# Altium PCB PAY_IFB_VER1.PcbDoc (part 2 of 4)
Units mil, origin at the board's own origin, x right, y up, seen from the top; angles counter-clockwise.
Board outline 6000 x 4000 mil, 2 copper layers (Top Layer, Bottom Layer); 413 components, 311 nets, 2101 pads, 9 vias.
Unrouted connection lines stored in the file: 1231.
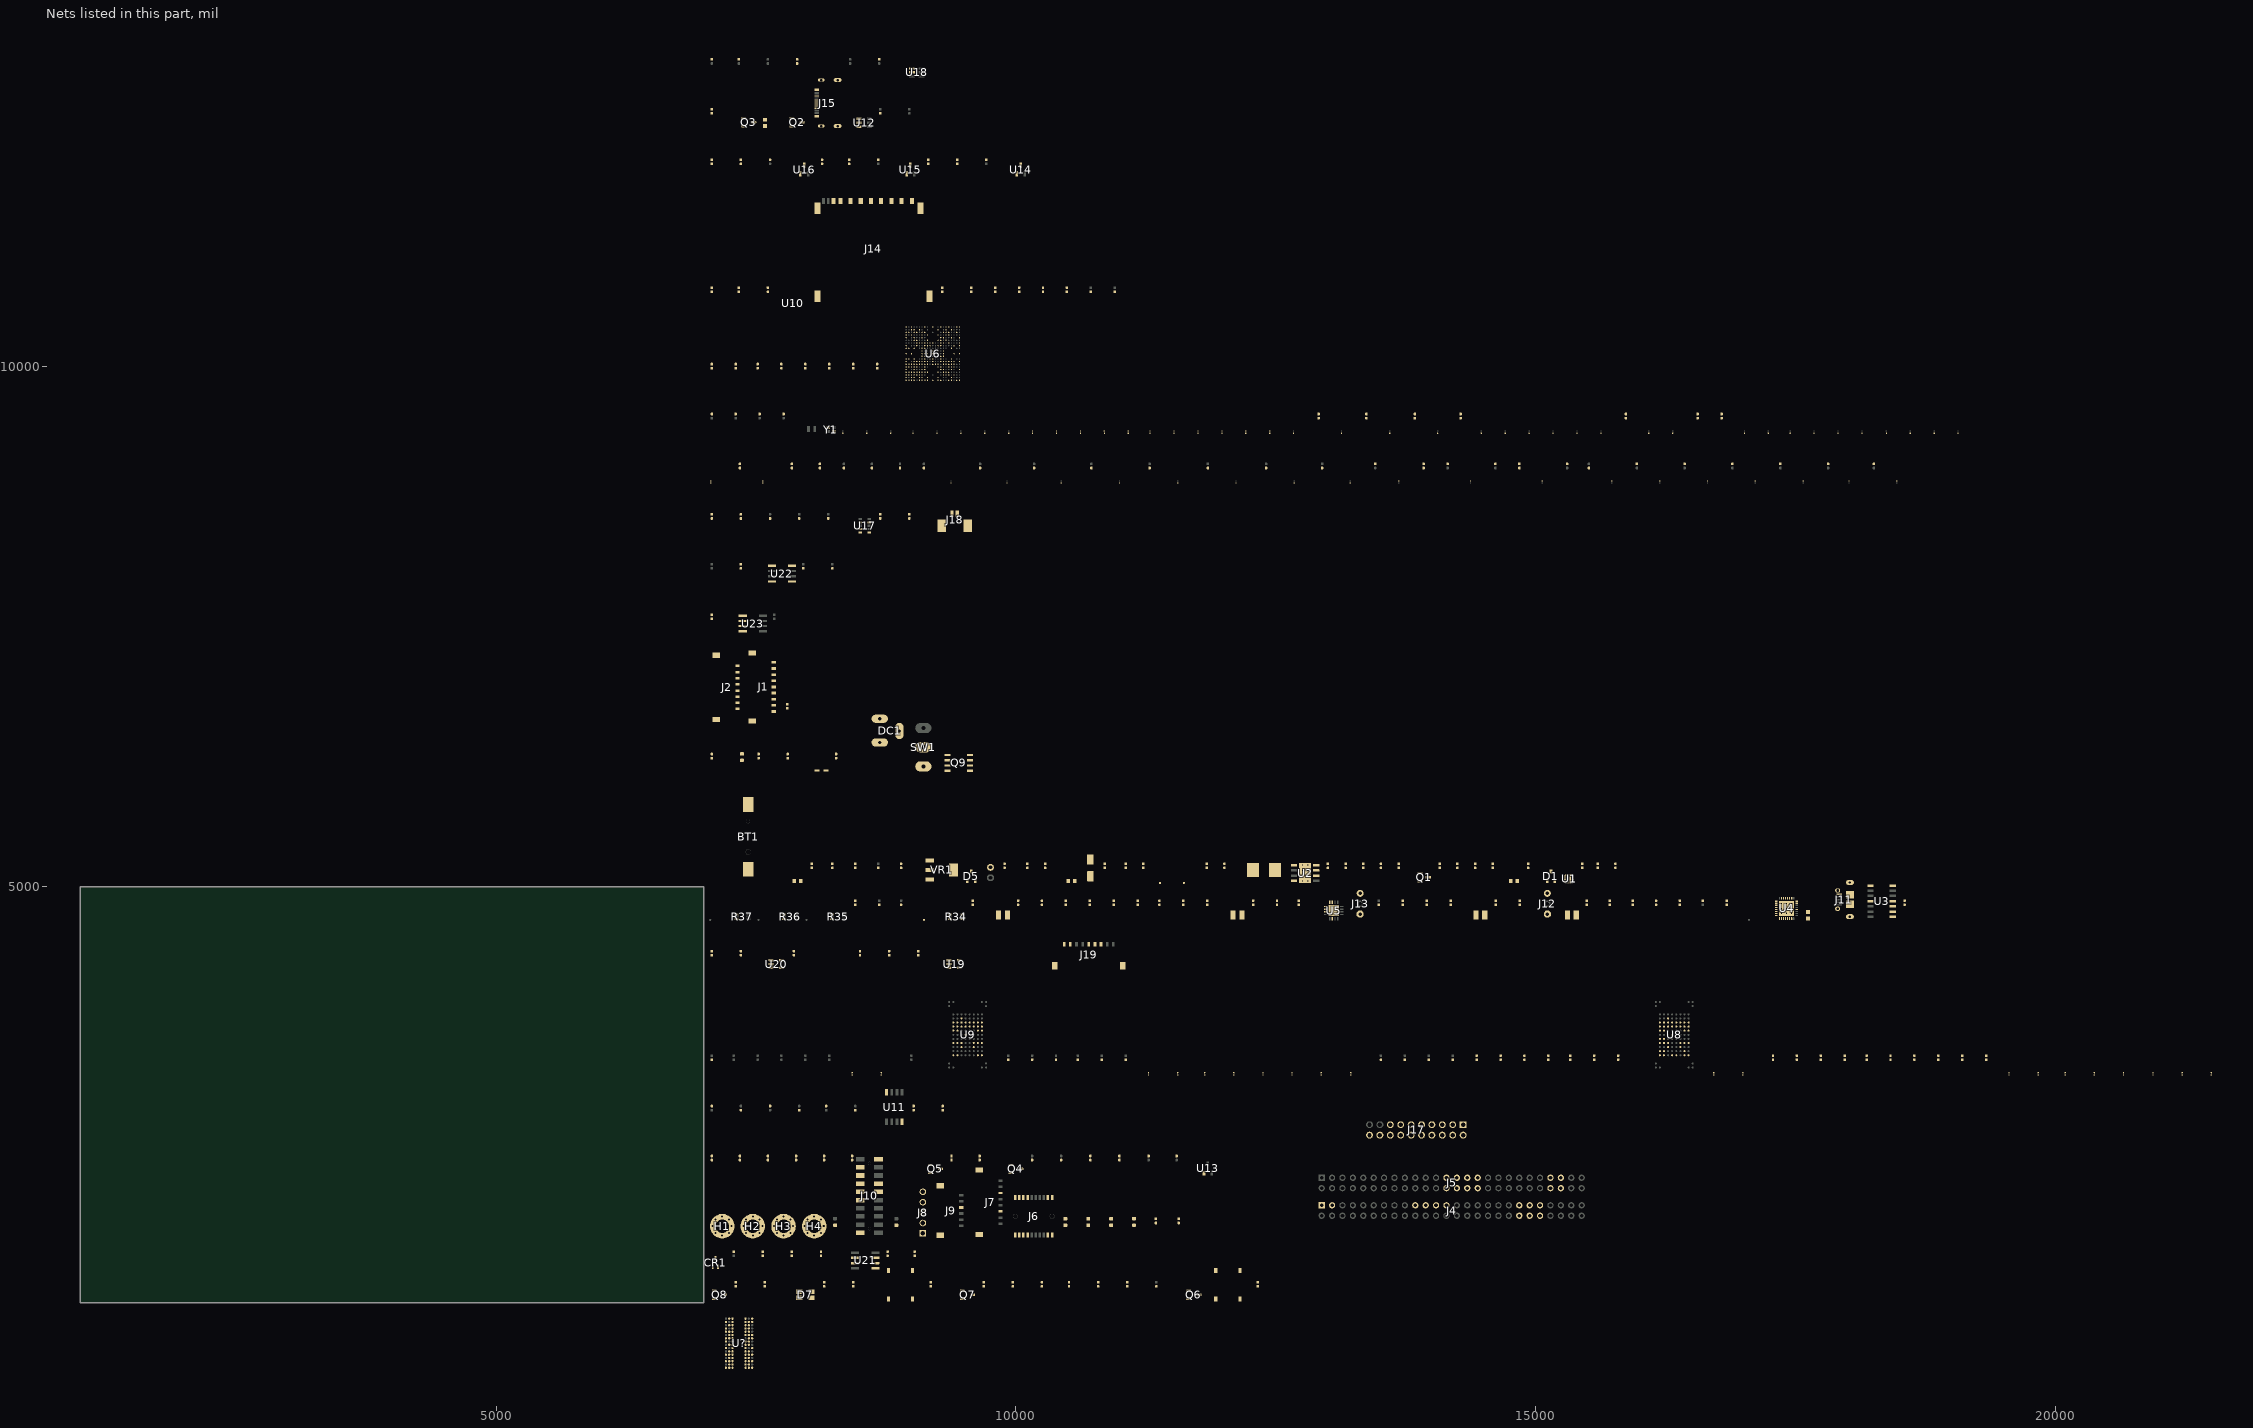
[diagram p2: the nets of this part, all layers, seen from the top]

## Footprints (in the part's own frame and the unit in brackets; to place one, negate y for a bottom-side part, rotate by r counter-clockwise, add the part's x,y. Pads: shape width x height; smd on the part's side, far side on the other; paste and mask are expansions set on the pad) (continued)
GCT_USB4520-03-0-A_REVA [mm]
  rect 0.6x1.1 smd: A1_B12(-3.2,5.15) A4_B9(-2.4,5.15) B1_A12(3.2,5.15) B4_A9(2.4,5.15)
  rect 0.3x1.1 smd: A5(-1.25,5.15) A6(-0.25,5.15) A7(0.25,5.15) A8(1.25,5.15) B5(1.75,5.15) B6(0.75,5.15) B7(-0.75,5.15) B8(-1.75,5.15)
  oval 0.95x1.9 hole 0.6 slot 1.8 at 90 deg mask+0: S1(-5.62,0) S4(5.62,0)
  oval 0.8x1.6 hole 0.6 slot 1.4 at 90 deg mask+0: S2(5.62,4) S3(-5.62,4)
  Top Layer region: 5.646,1.099 5.672,1.097 5.698,1.094 5.724,1.089 5.749,1.083 5.775,1.076 5.799,1.067 5.823,1.057 5.847,1.046 5.87,1.033 5.892,1.019 5.914,1.005 5.935,0.989 5.955,0.972 5.974,0.954 5.992,0.935 6.009,0.915 6.025,0.894 6.039,0.872 6.053,0.85 6.066,0.827 6.077,0.803 6.087,0.779 6.096,0.755 6.103,0.729 6.109,0.704 6.114,0.678 6.117,0.652 6.119,0.626 6.12,0.6 6.12,-0.6 6.119,-0.626 6.117,-0.652 6.114,-0.678 6.109,-0.704 6.103,-0.729 6.096,-0.755 6.087,-0.779 6.077,-0.803 6.066,-0.827 6.053,-0.85 6.039,-0.872 6.025,-0.894 6.009,-0.915 5.992,-0.935 5.974,-0.954 5.955,-0.972 5.935,-0.989 5.914,-1.005 5.892,-1.019 5.87,-1.033 5.847,-1.046 5.823,-1.057 5.799,-1.067 5.775,-1.076 5.749,-1.083 5.724,-1.089 5.698,-1.094 5.672,-1.097 5.646,-1.099 5.62,-1.1 5.594,-1.099 5.568,-1.097 5.542,-1.094 5.516,-1.089 5.491,-1.083 5.465,-1.076 5.441,-1.067 5.417,-1.057 5.393,-1.046 5.37,-1.033 5.348,-1.019 5.326,-1.005 5.305,-0.989 5.285,-0.972 5.266,-0.954 5.248,-0.935 5.231,-0.915 5.215,-0.894 5.201,-0.872 5.187,-0.85 5.174,-0.827 5.163,-0.803 5.153,-0.779 5.144,-0.755 5.137,-0.729 5.131,-0.704 5.126,-0.678 5.123,-0.652 5.121,-0.626 5.12,-0.6 5.12,0.6 5.121,0.626 5.123,0.652 5.126,0.678 5.131,0.704 5.137,0.729 5.144,0.755 5.153,0.779 5.163,0.803 5.174,0.827 5.187,0.85 5.201,0.872 5.215,0.894 5.231,0.915 5.248,0.935 5.266,0.954 5.285,0.972 5.305,0.989 5.326,1.005 5.348,1.019 5.37,1.033 5.393,1.046 5.417,1.057 5.441,1.067 5.465,1.076 5.491,1.083 5.516,1.089 5.542,1.094 5.568,1.097 5.594,1.099 5.62,1.1
  Top Layer region: -5.594,1.099 -5.568,1.097 -5.542,1.094 -5.516,1.089 -5.491,1.083 -5.465,1.076 -5.441,1.067 -5.417,1.057 -5.393,1.046 -5.37,1.033 -5.348,1.019 -5.326,1.005 -5.305,0.989 -5.285,0.972 -5.266,0.954 -5.248,0.935 -5.231,0.915 -5.215,0.894 -5.201,0.872 -5.187,0.85 -5.174,0.827 -5.163,0.803 -5.153,0.779 -5.144,0.755 -5.137,0.729 -5.131,0.704 -5.126,0.678 -5.123,0.652 -5.121,0.626 -5.12,0.6 -5.12,-0.6 -5.121,-0.626 -5.123,-0.652 -5.126,-0.678 -5.131,-0.704 -5.137,-0.729 -5.144,-0.755 -5.153,-0.779 -5.163,-0.803 -5.174,-0.827 -5.187,-0.85 -5.201,-0.872 -5.215,-0.894 -5.231,-0.915 -5.248,-0.935 -5.266,-0.954 -5.285,-0.972 -5.305,-0.989 -5.326,-1.005 -5.348,-1.019 -5.37,-1.033 -5.393,-1.046 -5.417,-1.057 -5.441,-1.067 -5.465,-1.076 -5.491,-1.083 -5.516,-1.089 -5.542,-1.094 -5.568,-1.097 -5.594,-1.099 -5.62,-1.1 -5.646,-1.099 -5.672,-1.097 -5.698,-1.094 -5.724,-1.089 -5.749,-1.083 -5.775,-1.076 -5.799,-1.067 -5.823,-1.057 -5.847,-1.046 -5.87,-1.033 -5.892,-1.019 -5.914,-1.005 -5.935,-0.989 -5.955,-0.972 -5.974,-0.954 -5.992,-0.935 -6.009,-0.915 -6.025,-0.894 -6.039,-0.872 -6.053,-0.85 -6.066,-0.827 -6.077,-0.803 -6.087,-0.779 -6.096,-0.755 -6.103,-0.729 -6.109,-0.704 -6.114,-0.678 -6.117,-0.652 -6.119,-0.626 -6.12,-0.6 -6.12,0.6 -6.119,0.626 -6.117,0.652 -6.114,0.678 -6.109,0.704 -6.103,0.729 -6.096,0.755 -6.087,0.779 -6.077,0.803 -6.066,0.827 -6.053,0.85 -6.039,0.872 -6.025,0.894 -6.009,0.915 -5.992,0.935 -5.974,0.954 -5.955,0.972 -5.935,0.989 -5.914,1.005 -5.892,1.019 -5.87,1.033 -5.847,1.046 -5.823,1.057 -5.799,1.067 -5.775,1.076 -5.749,1.083 -5.724,1.089 -5.698,1.094 -5.672,1.097 -5.646,1.099 -5.62,1.1
  Top Layer region: 5.646,4.899 5.672,4.897 5.698,4.894 5.724,4.889 5.749,4.883 5.775,4.876 5.799,4.867 5.823,4.857 5.847,4.846 5.87,4.833 5.892,4.819 5.914,4.805 5.935,4.789 5.955,4.772 5.974,4.754 5.992,4.735 6.009,4.715 6.025,4.694 6.039,4.672 6.053,4.65 6.066,4.627 6.077,4.603 6.087,4.579 6.096,4.555 6.103,4.529 6.109,4.504 6.114,4.478 6.117,4.452 6.119,4.426 6.12,4.4 6.12,3.6 6.119,3.574 6.117,3.548 6.114,3.522 6.109,3.496 6.103,3.471 6.096,3.445 6.087,3.421 6.077,3.397 6.066,3.373 6.053,3.35 6.039,3.328 6.025,3.306 6.009,3.285 5.992,3.265 5.974,3.246 5.955,3.228 5.935,3.211 5.914,3.195 5.892,3.181 5.87,3.167 5.847,3.154 5.823,3.143 5.799,3.133 5.775,3.124 5.749,3.117 5.724,3.111 5.698,3.106 5.672,3.103 5.646,3.101 5.62,3.1 5.594,3.101 5.568,3.103 5.542,3.106 5.516,3.111 5.491,3.117 5.465,3.124 5.441,3.133 5.417,3.143 5.393,3.154 5.37,3.167 5.348,3.181 5.326,3.195 5.305,3.211 5.285,3.228 5.266,3.246 5.248,3.265 5.231,3.285 5.215,3.306 5.201,3.328 5.187,3.35 5.174,3.373 5.163,3.397 5.153,3.421 5.144,3.445 5.137,3.471 5.131,3.496 5.126,3.522 5.123,3.548 5.121,3.574 5.12,3.6 5.12,4.4 5.121,4.426 5.123,4.452 5.126,4.478 5.131,4.504 5.137,4.529 5.144,4.555 5.153,4.579 5.163,4.603 5.174,4.627 5.187,4.65 5.201,4.672 5.215,4.694 5.231,4.715 5.248,4.735 5.266,4.754 5.285,4.772 5.305,4.789 5.326,4.805 5.348,4.819 5.37,4.833 5.393,4.846 5.417,4.857 5.441,4.867 5.465,4.876 5.491,4.883 5.516,4.889 5.542,4.894 5.568,4.897 5.594,4.899 5.62,4.9
  Top Layer region: -5.594,4.899 -5.568,4.897 -5.542,4.894 -5.516,4.889 -5.491,4.883 -5.465,4.876 -5.441,4.867 -5.417,4.857 -5.393,4.846 -5.37,4.833 -5.348,4.819 -5.326,4.805 -5.305,4.789 -5.285,4.772 -5.266,4.754 -5.248,4.735 -5.231,4.715 -5.215,4.694 -5.201,4.672 -5.187,4.65 -5.174,4.627 -5.163,4.603 -5.153,4.579 -5.144,4.555 -5.137,4.529 -5.131,4.504 -5.126,4.478 -5.123,4.452 -5.121,4.426 -5.12,4.4 -5.12,3.6 -5.121,3.574 -5.123,3.548 -5.126,3.522 -5.131,3.496 -5.137,3.471 -5.144,3.445 -5.153,3.421 -5.163,3.397 -5.174,3.373 -5.187,3.35 -5.201,3.328 -5.215,3.306 -5.231,3.285 -5.248,3.265 -5.266,3.246 -5.285,3.228 -5.305,3.211 -5.326,3.195 -5.348,3.181 -5.37,3.167 -5.393,3.154 -5.417,3.143 -5.441,3.133 -5.465,3.124 -5.491,3.117 -5.516,3.111 -5.542,3.106 -5.568,3.103 -5.594,3.101 -5.62,3.1 -5.646,3.101 -5.672,3.103 -5.698,3.106 -5.724,3.111 -5.749,3.117 -5.775,3.124 -5.799,3.133 -5.823,3.143 -5.847,3.154 -5.87,3.167 -5.892,3.181 -5.914,3.195 -5.935,3.211 -5.955,3.228 -5.974,3.246 -5.992,3.265 -6.009,3.285 -6.025,3.306 -6.039,3.328 -6.053,3.35 -6.066,3.373 -6.077,3.397 -6.087,3.421 -6.096,3.445 -6.103,3.471 -6.109,3.496 -6.114,3.522 -6.117,3.548 -6.119,3.574 -6.12,3.6 -6.12,4.4 -6.119,4.426 -6.117,4.452 -6.114,4.478 -6.109,4.504 -6.103,4.529 -6.096,4.555 -6.087,4.579 -6.077,4.603 -6.066,4.627 -6.053,4.65 -6.039,4.672 -6.025,4.694 -6.009,4.715 -5.992,4.735 -5.974,4.754 -5.955,4.772 -5.935,4.789 -5.914,4.805 -5.892,4.819 -5.87,4.833 -5.847,4.846 -5.823,4.857 -5.799,4.867 -5.775,4.876 -5.749,4.883 -5.724,4.889 -5.698,4.894 -5.672,4.897 -5.646,4.899 -5.62,4.9
  Bottom Layer region: -5.594,1.099 -5.568,1.097 -5.542,1.094 -5.516,1.089 -5.491,1.083 -5.465,1.076 -5.441,1.067 -5.417,1.057 -5.393,1.046 -5.37,1.033 -5.348,1.019 -5.326,1.005 -5.305,0.989 -5.285,0.972 -5.266,0.954 -5.248,0.935 -5.231,0.915 -5.215,0.894 -5.201,0.872 -5.187,0.85 -5.174,0.827 -5.163,0.803 -5.153,0.779 -5.144,0.755 -5.137,0.729 -5.131,0.704 -5.126,0.678 -5.123,0.652 -5.121,0.626 -5.12,0.6 -5.12,-0.6 -5.121,-0.626 -5.123,-0.652 -5.126,-0.678 -5.131,-0.704 -5.137,-0.729 -5.144,-0.755 -5.153,-0.779 -5.163,-0.803 -5.174,-0.827 -5.187,-0.85 -5.201,-0.872 -5.215,-0.894 -5.231,-0.915 -5.248,-0.935 -5.266,-0.954 -5.285,-0.972 -5.305,-0.989 -5.326,-1.005 -5.348,-1.019 -5.37,-1.033 -5.393,-1.046 -5.417,-1.057 -5.441,-1.067 -5.465,-1.076 -5.491,-1.083 -5.516,-1.089 -5.542,-1.094 -5.568,-1.097 -5.594,-1.099 -5.62,-1.1 -5.646,-1.099 -5.672,-1.097 -5.698,-1.094 -5.724,-1.089 -5.749,-1.083 -5.775,-1.076 -5.799,-1.067 -5.823,-1.057 -5.847,-1.046 -5.87,-1.033 -5.892,-1.019 -5.914,-1.005 -5.935,-0.989 -5.955,-0.972 -5.974,-0.954 -5.992,-0.935 -6.009,-0.915 -6.025,-0.894 -6.039,-0.872 -6.053,-0.85 -6.066,-0.827 -6.077,-0.803 -6.087,-0.779 -6.096,-0.755 -6.103,-0.729 -6.109,-0.704 -6.114,-0.678 -6.117,-0.652 -6.119,-0.626 -6.12,-0.6 -6.12,0.6 -6.119,0.626 -6.117,0.652 -6.114,0.678 -6.109,0.704 -6.103,0.729 -6.096,0.755 -6.087,0.779 -6.077,0.803 -6.066,0.827 -6.053,0.85 -6.039,0.872 -6.025,0.894 -6.009,0.915 -5.992,0.935 -5.974,0.954 -5.955,0.972 -5.935,0.989 -5.914,1.005 -5.892,1.019 -5.87,1.033 -5.847,1.046 -5.823,1.057 -5.799,1.067 -5.775,1.076 -5.749,1.083 -5.724,1.089 -5.698,1.094 -5.672,1.097 -5.646,1.099 -5.62,1.1
  Bottom Layer region: 5.646,1.099 5.672,1.097 5.698,1.094 5.724,1.089 5.749,1.083 5.775,1.076 5.799,1.067 5.823,1.057 5.847,1.046 5.87,1.033 5.892,1.019 5.914,1.005 5.935,0.989 5.955,0.972 5.974,0.954 5.992,0.935 6.009,0.915 6.025,0.894 6.039,0.872 6.053,0.85 6.066,0.827 6.077,0.803 6.087,0.779 6.096,0.755 6.103,0.729 6.109,0.704 6.114,0.678 6.117,0.652 6.119,0.626 6.12,0.6 6.12,-0.6 6.119,-0.626 6.117,-0.652 6.114,-0.678 6.109,-0.704 6.103,-0.729 6.096,-0.755 6.087,-0.779 6.077,-0.803 6.066,-0.827 6.053,-0.85 6.039,-0.872 6.025,-0.894 6.009,-0.915 5.992,-0.935 5.974,-0.954 5.955,-0.972 5.935,-0.989 5.914,-1.005 5.892,-1.019 5.87,-1.033 5.847,-1.046 5.823,-1.057 5.799,-1.067 5.775,-1.076 5.749,-1.083 5.724,-1.089 5.698,-1.094 5.672,-1.097 5.646,-1.099 5.62,-1.1 5.594,-1.099 5.568,-1.097 5.542,-1.094 5.516,-1.089 5.491,-1.083 5.465,-1.076 5.441,-1.067 5.417,-1.057 5.393,-1.046 5.37,-1.033 5.348,-1.019 5.326,-1.005 5.305,-0.989 5.285,-0.972 5.266,-0.954 5.248,-0.935 5.231,-0.915 5.215,-0.894 5.201,-0.872 5.187,-0.85 5.174,-0.827 5.163,-0.803 5.153,-0.779 5.144,-0.755 5.137,-0.729 5.131,-0.704 5.126,-0.678 5.123,-0.652 5.121,-0.626 5.12,-0.6 5.12,0.6 5.121,0.626 5.123,0.652 5.126,0.678 5.131,0.704 5.137,0.729 5.144,0.755 5.153,0.779 5.163,0.803 5.174,0.827 5.187,0.85 5.201,0.872 5.215,0.894 5.231,0.915 5.248,0.935 5.266,0.954 5.285,0.972 5.305,0.989 5.326,1.005 5.348,1.019 5.37,1.033 5.393,1.046 5.417,1.057 5.441,1.067 5.465,1.076 5.491,1.083 5.516,1.089 5.542,1.094 5.568,1.097 5.594,1.099 5.62,1.1
  Bottom Layer region: 5.646,4.899 5.672,4.897 5.698,4.894 5.724,4.889 5.749,4.883 5.775,4.876 5.799,4.867 5.823,4.857 5.847,4.846 5.87,4.833 5.892,4.819 5.914,4.805 5.935,4.789 5.955,4.772 5.974,4.754 5.992,4.735 6.009,4.715 6.025,4.694 6.039,4.672 6.053,4.65 6.066,4.627 6.077,4.603 6.087,4.579 6.096,4.555 6.103,4.529 6.109,4.504 6.114,4.478 6.117,4.452 6.119,4.426 6.12,4.4 6.12,3.6 6.119,3.574 6.117,3.548 6.114,3.522 6.109,3.496 6.103,3.471 6.096,3.445 6.087,3.421 6.077,3.397 6.066,3.373 6.053,3.35 6.039,3.328 6.025,3.306 6.009,3.285 5.992,3.265 5.974,3.246 5.955,3.228 5.935,3.211 5.914,3.195 5.892,3.181 5.87,3.167 5.847,3.154 5.823,3.143 5.799,3.133 5.775,3.124 5.749,3.117 5.724,3.111 5.698,3.106 5.672,3.103 5.646,3.101 5.62,3.1 5.594,3.101 5.568,3.103 5.542,3.106 5.516,3.111 5.491,3.117 5.465,3.124 5.441,3.133 5.417,3.143 5.393,3.154 5.37,3.167 5.348,3.181 5.326,3.195 5.305,3.211 5.285,3.228 5.266,3.246 5.248,3.265 5.231,3.285 5.215,3.306 5.201,3.328 5.187,3.35 5.174,3.373 5.163,3.397 5.153,3.421 5.144,3.445 5.137,3.471 5.131,3.496 5.126,3.522 5.123,3.548 5.121,3.574 5.12,3.6 5.12,4.4 5.121,4.426 5.123,4.452 5.126,4.478 5.131,4.504 5.137,4.529 5.144,4.555 5.153,4.579 5.163,4.603 5.174,4.627 5.187,4.65 5.201,4.672 5.215,4.694 5.231,4.715 5.248,4.735 5.266,4.754 5.285,4.772 5.305,4.789 5.326,4.805 5.348,4.819 5.37,4.833 5.393,4.846 5.417,4.857 5.441,4.867 5.465,4.876 5.491,4.883 5.516,4.889 5.542,4.894 5.568,4.897 5.594,4.899 5.62,4.9
  Bottom Layer region: -5.594,4.899 -5.568,4.897 -5.542,4.894 -5.516,4.889 -5.491,4.883 -5.465,4.876 -5.441,4.867 -5.417,4.857 -5.393,4.846 -5.37,4.833 -5.348,4.819 -5.326,4.805 -5.305,4.789 -5.285,4.772 -5.266,4.754 -5.248,4.735 -5.231,4.715 -5.215,4.694 -5.201,4.672 -5.187,4.65 -5.174,4.627 -5.163,4.603 -5.153,4.579 -5.144,4.555 -5.137,4.529 -5.131,4.504 -5.126,4.478 -5.123,4.452 -5.121,4.426 -5.12,4.4 -5.12,3.6 -5.121,3.574 -5.123,3.548 -5.126,3.522 -5.131,3.496 -5.137,3.471 -5.144,3.445 -5.153,3.421 -5.163,3.397 -5.174,3.373 -5.187,3.35 -5.201,3.328 -5.215,3.306 -5.231,3.285 -5.248,3.265 -5.266,3.246 -5.285,3.228 -5.305,3.211 -5.326,3.195 -5.348,3.181 -5.37,3.167 -5.393,3.154 -5.417,3.143 -5.441,3.133 -5.465,3.124 -5.491,3.117 -5.516,3.111 -5.542,3.106 -5.568,3.103 -5.594,3.101 -5.62,3.1 -5.646,3.101 -5.672,3.103 -5.698,3.106 -5.724,3.111 -5.749,3.117 -5.775,3.124 -5.799,3.133 -5.823,3.143 -5.847,3.154 -5.87,3.167 -5.892,3.181 -5.914,3.195 -5.935,3.211 -5.955,3.228 -5.974,3.246 -5.992,3.265 -6.009,3.285 -6.025,3.306 -6.039,3.328 -6.053,3.35 -6.066,3.373 -6.077,3.397 -6.087,3.421 -6.096,3.445 -6.103,3.471 -6.109,3.496 -6.114,3.522 -6.117,3.548 -6.119,3.574 -6.12,3.6 -6.12,4.4 -6.119,4.426 -6.117,4.452 -6.114,4.478 -6.109,4.504 -6.103,4.529 -6.096,4.555 -6.087,4.579 -6.077,4.603 -6.066,4.627 -6.053,4.65 -6.039,4.672 -6.025,4.694 -6.009,4.715 -5.992,4.735 -5.974,4.754 -5.955,4.772 -5.935,4.789 -5.914,4.805 -5.892,4.819 -5.87,4.833 -5.847,4.846 -5.823,4.857 -5.799,4.867 -5.775,4.876 -5.749,4.883 -5.724,4.889 -5.698,4.894 -5.672,4.897 -5.646,4.899 -5.62,4.9
  silkscreen extent -4.47,-1.6 4.47,6.45, body extent -5.77,-2.1 5.77,5.1, height 1.06
HDR_M_2.54_1x2 [mm] "Header Male Vertical 2 Way 2.54mm Pitch"
  oct 1.7x1.7 hole 0.9: 1(-1.27,0)
  round 1.7 hole 0.9: 2(1.27,0)
  silkscreen extent -2.52,-1.27 2.54,1.28, body extent -2.54,-1.27 2.54,1.27, height 5.94
HDR_M_2.54_1x3 [mm] "Header Male Vertical 4 Way P=2.54mm"
  oct 1.7x1.7 hole 0.9: 1(-2.54,0)
  round 1.7 hole 0.9: 2(0,0) 3(2.54,0)
  silkscreen extent -3.94,-1.4 3.96,1.4, body extent -3.8,-1.26 3.82,1.28, height 5.94
HDR_M_2.54_2X10_SBH11-PBPC-D10-ST-BK [mil] "20 Positions Header Connector 0.100\" (2.54mm) Through Hole Gold"
  rect 66x66 hole 42: 1(-450,-50)
  round 66 hole 42: 2(-450,50) 3(-350,-50) 4(-350,50) 5(-250,-50) 6(-250,50) 7(-150,-50) 8(-150,50) 9(-50,-50) 10(-50,50) 11(50,-50) 12(50,50) 13(150,-50) 14(150,50) 15(250,-50) 16(250,50) 17(350,-50) 18(350,50) 19(450,-50) 20(450,50)
  silkscreen extent -659,-185 659,197, body extent -648,-173 648,185, height 359
Header_254P_5x1 [mm]
  rect 1.6x1.6 hole 1.1: 1(-5.08,0)
  round 1.6 hole 1.1: 2(-2.54,0) 3(0,0) 4(2.54,0) 5(5.08,0)
  silkscreen extent -6.35,-1.27 6.35,1.27, body extent -6.38,-1.22 6.32,1.18, height 8.48
HOLE_SPACE [mm]
  round 1 hole 0.5: 1(-2.325,0) 1(-1.644,-1.644) 1(-1.644,1.644) 1(0,-2.286) 1(0,2.325) 1(1.644,-1.644) 1(1.644,1.644) 1(2.325,0)
  round 6 hole 3.3: 1(0,0)
IC_MIC94085YFT-TR [mm]
  rect 0.2x0.2 smd paste-1 mask+0: 1(-0.2,0.2) 2(-0.2,-0.2) 3(0.2,-0.2) 4(0.2,0.2)
  Top Layer region: 0.32,0.32 0.53,0.32 0.53,0.09 0.09,0.09 0.09,0.53 0.32,0.53
  Top Layer region: -0.09,-0.53 -0.32,-0.53 -0.32,-0.32 -0.53,-0.32 -0.53,-0.09 -0.09,-0.09
  Top Layer region: 0.53,-0.32 0.32,-0.32 0.32,-0.53 0.09,-0.53 0.09,-0.09 0.53,-0.09
  Top Layer region: -0.09,0.09 -0.53,0.09 -0.53,0.32 -0.32,0.32 -0.32,0.53 -0.09,0.53
  silkscreen extent -1.07,0.2 -0.97,0.3, body extent -0.43,-0.43 0.43,0.43, height 0.6
IC_RV-3129-C3-32.768KHZ-OPTION-A-TB-QA [mm]
  rect 0.8x0.5 smd: 1(-1.1,1.6) 2(-1.1,0.8) 3(-1.1,0) 4(-1.1,-0.8) 5(-1.1,-1.6) 6(1.1,-1.6) 7(1.1,-0.8) 8(1.1,0) 9(1.1,0.8) 10(1.1,1.6)
  silkscreen extent -2.25,-1.85 0.38,1.85, body extent -1.25,-1.85 1.25,1.85, height 0.9
IND_BLM18_0603_MUR [mil]
  rect 37.78x37 smd paste+0 mask+0: 1(-29.39,0) 2(29.39,0)
  Top Layer keep-out region: -8.5,-16.5 -8.5,16.5 8.5,16.5 8.5,-16.5
  Keep-Out Layer region: -8.5,-18.5 -8.5,18.5 8.5,18.5 8.5,-18.5
  silkscreen extent -63,-3 -57,3, body extent -34,-19 34,19, height 37
INDC2520X120N [mm]
  rect 1.24x2.22 smd: 1(-1.09,0) 2(1.09,0)
  silkscreen extent -0.15,-1.1 0.15,1.1, body extent -1.25,-1 1.25,1, height 1.2
JUMPER_1608 [mil]
  round 1 smd: 1(30.51,0)
  round 1 smd paste-99999 mask+4: 2(-30,0)
  Top Layer region: 38.88,-18.7 13.56,-18.7 -5,0 13.56,18.7 38.88,18.7 42.08,18.06 44.79,16.25 46.61,13.54 47.24,10.33 47.24,10.33 47.24,-10.33 46.61,-13.54 44.79,-16.25 42.08,-18.06 38.88,-18.7
  Top Layer region: -14.86,-0.09 3.75,-18.7 -38.37,-18.7 -41.57,-18.06 -44.28,-16.25 -46.1,-13.54 -46.73,-10.33 -46.73,-10.33 -46.73,10.33 -46.1,13.54 -44.28,16.25 -41.57,18.06 -38.37,18.7 -38.37,18.7 3.93,18.7
  silkscreen extent -40,-27 41,27
LED-0603-GREEN [mm]
  rect 0.9x1 smd: 1(-0.8,0) 2(0.8,0)
  silkscreen extent -1.27,-0.58 1.27,0.58, body extent -0.81,-0.5 0.81,0.5, height 0.98
LED-0603-RED [mm]
  rect 0.9x1 smd: 1(-0.8,0) 2(0.8,0)
  silkscreen extent -1.27,-0.58 1.27,0.58, body extent -0.81,-0.5 0.81,0.5, height 0.98
LED-0603-YELLOW [mm]
  rect 0.9x1 smd: 1(-0.8,0) 2(0.8,0)
  silkscreen extent -1.27,-0.58 1.27,0.58, body extent -0.81,-0.5 0.81,0.5, height 0.98
LED_0603 [mm]
  rrect50% 0.85x0.95 smd: 1(-0.775,0) 2(0.775,0)
  silkscreen extent -1.4,-0.7 0.9,0.7, body extent -0.8,-0.4 0.8,0.4, height 0.7
molex_0532610271 [mm]
  rect 0.8x1.6 smd mask+0.076: 1(-0.625,2.4) 2(0.625,2.4)
  rect 2.1x3 smd mask+0.076: M1(-3.175,-0.5) M2(3.175,-0.5)
  silkscreen extent -3.83,-2.6 3.83,4.64, body extent -3.83,-2.6 3.83,2.6, height 3.4
MOLEX_5040500891 [mm]
  rect 0.6x1 smd mask+0.076: 1(5.25,-2.87) 2(3.75,-2.87) 3(2.25,-2.87) 4(0.75,-2.87) 5(-0.75,-2.87) 6(-2.25,-2.87) 7(-3.75,-2.87) 8(-5.25,-2.87)
  rect 1.25x1.8 smd mask+0.076: M1(7.855,2.32) M2(-7.855,2.32)
  silkscreen extent -8.27,-3.7 8.27,3.22, body extent -8.27,-3.2 8.27,3.24, height 2
PLCC-4_CLV1A-FKB [mm] "PLCC4 3 in 1 SMD LED"
  rect 1.5x1.1 smd: 1(-1.5,0.75) 2(-1.5,-0.75) 3(1.5,-0.75) 4(1.5,0.75)
  silkscreen extent -2.55,-1.6 2.55,1.6, body extent -1.75,-1.4 1.75,1.4, height 1.9
QFN-32_5X5_EP3.7X3.7 [mm] "QFN32_5MMwith ePAD"
  rrect50% 0.7x0.3 smd mask+0.05: 1(-2.5,1.75) 2(-2.5,1.25) 3(-2.5,0.75) 4(-2.5,0.25) 5(-2.5,-0.25) 6(-2.5,-0.75) 7(-2.5,-1.25) 8(-2.5,-1.75) 17(2.5,-1.75) 18(2.5,-1.25) 19(2.5,-0.75) 20(2.5,-0.25) 21(2.5,0.25) 22(2.5,0.75) 23(2.5,1.25) 24(2.5,1.75)
  rrect50% 0.3x0.7 smd mask+0.05: 9(-1.75,-2.5) 10(-1.25,-2.5) 11(-0.75,-2.5) 12(-0.25,-2.5) 13(0.25,-2.5) 14(0.75,-2.5) 15(1.25,-2.5) 16(1.75,-2.5) 25(1.75,2.5) 26(1.25,2.5) 27(0.75,2.5) 28(0.25,2.5) 29(-0.25,2.5) 30(-0.75,2.5) 31(-1.25,2.5) 32(-1.75,2.5)
  rect 3.7x3.7 smd mask+0.05: 33(0,0)
  silkscreen extent -2.65,-2.65 2.65,2.68, body extent -2.56,-2.56 2.56,2.56, height 1.01
RES_C_1005X40 [mm]
  rrect50% 0.65x0.6 smd mask+0.05: 1(-0.5,0) 2(0.5,0)
  silkscreen extent -0.08,-0.3 0.08,0.3, body extent -0.5,-0.25 0.5,0.25, height 0.38
RES_C_1206_SHUNT [mm] "Chip Resistor, 2-Leads, Body 3.2x1.6mm, IPC Medium Density"
  rect 1x0.5 smd mask+0.05: 1(-1.5,-0.6) 1(-1.5,0.6) 2(1.5,-0.6) 2(1.5,0.6)
  rect 1x0.35 smd mask+0.05: 3(-1.5,0) 4(1.5,0)
  silkscreen extent -0.6,-0.77 0.6,0.78, body extent -1.6,-0.8 1.6,0.8, height 1
RES_C_1608X60 [mm] "Chip Resistor, 2-Leads, Body 1.63x0.83mm, IPC High Density"
  rrect50% 0.85x0.95 smd: 1(-0.8,0) 2(0.8,0)
  silkscreen extent -0.9,-0.7 0.9,0.7, body extent -0.87,-0.48 0.87,0.48, height 0.6
SAMTEC-TLE-110-01-X-DV-A [mm]
  rect 1.12x2.11 smd mask+0: 1(-9,-2.222) 2(-9,2.222) 3(-7,-2.222) 4(-7,2.222) 5(-5,-2.222) 6(-5,2.222) 7(-3,-2.222) 8(-3,2.222) 9(-1,-2.222) 10(-1,2.222) 11(1,-2.222) 12(1,2.222) 13(3,-2.222) 14(3,2.222) 15(5,-2.222) 16(5,2.222) 17(7,-2.222) 18(7,2.222) 19(9,-2.222) 20(9,2.222)
  round 0.76 hole 0.76 unplated: ""(-8,0) ""(8,0)
  silkscreen extent -10.45,-4.45 10.45,3.73, body extent -9.99,-2.78 9.99,2.78, height 4.32
SAMTEC_FSI-110-03-X-D-AD-TR [mm]
  rect 0.61x1.26 smd: 01(-4.5,4.59) 02(-4.5,-4.59) 03(-3.5,4.59) 04(-3.5,-4.59) 05(-2.5,4.59) 06(-2.5,-4.59) 07(-1.5,4.59) 08(-1.5,-4.59) 09(-0.5,4.59) 10(-0.5,-4.59) 11(0.5,4.59) 12(0.5,-4.59) 13(1.5,4.59) 14(1.5,-4.59) 15(2.5,4.59) 16(2.5,-4.59) 17(3.5,4.59) 18(3.5,-4.59) 19(4.5,4.59) 20(4.5,-4.59)
  round 1.19 hole 1.19 unplated: ""(-4.5,0) ""(4.5,0)
  silkscreen extent -5.38,-4.38 5.38,5.9, body extent -5.38,-5 5.38,5, height 4.37
SO8SOP-8L_AOS [mil]
  rect 57.5x22 smd paste+0 mask+0: 1(-107.25,75) 2(-107.25,25) 3(-107.25,-25) 4(-107.25,-75) 5(107.25,-75) 6(107.25,-25) 7(107.25,25) 8(107.25,75)
  silkscreen extent -84,-104 84,104, body extent -122,-99 122,99, height 69
SOIC127P599X175-8N [mm] "SN65HVD230DR"
  rrect25% 1.97x0.6 smd: 1(-2.47,1.905) 2(-2.47,0.635) 3(-2.47,-0.635) 4(-2.47,-1.905) 5(2.47,-1.905) 6(2.47,-0.635) 7(2.47,0.635) 8(2.47,1.905)
  silkscreen extent -4.14,-2.52 1.95,2.52, body extent -3,-2.45 3,2.45, height 1.75
SOIC127P790X216-8N [mm]
  rect 1.65x0.7 smd: 1(-3.6,1.905) 2(-3.6,0.635) 3(-3.6,-0.635) 4(-3.6,-1.905) 5(3.6,-1.905) 6(3.6,-0.635) 7(3.6,0.635) 8(3.6,1.905)
  silkscreen extent -4.27,-2.62 2.42,2.62, body extent -3.95,-2.62 3.95,2.62, height 2.16
SOIC-14 [mm] "SOIC 150mil, 14-Leads, Body 8.65x3.9mm, Pitch 1.27mm"
  rect 1.5x0.6 smd: 1(-2.7,3.81) 2(-2.7,2.54) 3(-2.7,1.27) 4(-2.7,0) 5(-2.7,-1.27) 6(-2.7,-2.54) 7(-2.7,-3.81) 8(2.7,-3.81) 9(2.7,-2.54) 10(2.7,-1.27) 11(2.7,0) 12(2.7,1.27) 13(2.7,2.54) 14(2.7,3.81)
  silkscreen extent -1.5,-4.5 1.5,4.5, body extent -3.1,-4.37 3.1,4.38, height 1.75
SOT95P240X120-3N [mm]
  rrect25% 1.32x0.6 smd: 1(-1,0.95) 2(-1,-0.95) 3(1,0)
  silkscreen extent -2.37,-1.45 0.65,1.45, body extent -1.2,-1.45 1.2,1.45, height 1.2
SOT95P280X125-3N [mm]
  rrect50% 1.21x0.59 smd: 1(-1.255,0.95) 2(-1.255,-0.95) 3(1.255,0)
  silkscreen extent -2.41,-1.55 0.9,1.55, body extent -1.4,-1.45 1.4,1.45, height 1.25
SOT95P280X145-6N [mm]
  rrect25% 1.21x0.59 smd: 1(-1.255,0.95) 2(-1.255,0) 3(-1.255,-0.95) 4(1.255,-0.95) 5(1.255,0) 6(1.255,0.95)
  silkscreen extent -2.65,-1.57 0.81,1.57, body extent -1.4,-1.46 1.4,1.46, height 1.42
SOT323-3L_STM [mil]
  rect 18x40 smd paste+0 mask+0: 1(-25.59,-41) 2(25.59,-41) 3(0,41)
  silkscreen extent -48,-87 48,32, body extent -44,-47 44,47, height 43
SOT-23-3 [mm]
  rect 0.65x1.05 smd: 1(-0.95,-1.15) 2(0.95,-1.15) 3(0,1.15)
  silkscreen extent -1.55,-0.7 1.55,0.72, body extent -1.5,-1.25 1.5,1.25, height 1.09
SOT-23_MC_MCH [mil]
  rect 24x52 smd paste+0 mask+0: 1(-37.4,-39.97) 2(37.4,-39.97) 3(0,39.97)
  silkscreen extent -65,-94 65,33, body extent -60,-52 60,52, height 44
SRP7050TA-220M [mm]
  rect 2.95x3.5 smd: 1(-2.725,0) 2(2.725,0)
  silkscreen extent -4.4,-3.3 4.4,3.3, body extent -3.65,-3.3 3.65,3.3, height 4.6
SS12D10 [mm]
  oval 2.5x4 hole 1 slot 1.7 at 90 deg: 1(-4.7,0) 2(0,0) 3(4.7,0)
  silkscreen extent -6.5,-3.4 6.5,3.4, body extent -6.5,-3.4 6.5,3.4, height 10.76
SW2-SMD [mm]
  rect 1.2x0.8 smd: 1(-3.5,0) 2(3.5,0)
  silkscreen extent -2.82,-1.85 2.82,1.85, body extent -3.05,-1.85 3.05,1.85, height 2.5
Testpoint_50 [mm]
  round 0.5 smd paste-2539.97 mask+0: 0(0,0)
TFBGA-343_14x14 [mm] "BGA, 343-Leads, Body 14,00mm x14,00mm, Pitch 0,65mm"
  round 0.3 smd mask+0.05: A1(-6.5,6.5) A2(-5.85,6.5) A3(-5.2,6.5) A4(-4.55,6.5) A5(-3.9,6.5) A6(-3.25,6.5) A7(-2.6,6.5) A8(-1.95,6.5) A9(-1.3,6.5) A11(0,6.5) A13(1.3,6.5) A14(1.95,6.5) A15(2.6,6.5) A16(3.25,6.5) A17(3.9,6.5) A18(4.55,6.5) A19(5.2,6.5) A20(5.85,6.5) A21(6.5,6.5) AA1(-6.5,-6.5) AA2(-5.85,-6.5) AA3(-5.2,-6.5) AA4(-4.55,-6.5) AA5(-3.9,-6.5) AA6(-3.25,-6.5) AA7(-2.6,-6.5) AA8(-1.95,-6.5) AA9(-1.3,-6.5) AA11(0,-6.5) AA13(1.3,-6.5) AA14(1.95,-6.5) AA15(2.6,-6.5) AA16(3.25,-6.5) AA17(3.9,-6.5) AA18(4.55,-6.5) AA19(5.2,-6.5) AA20(5.85,-6.5) AA21(6.5,-6.5) B1(-6.5,5.85) B2(-5.85,5.85) B3(-5.2,5.85) B4(-4.55,5.85) B6(-3.25,5.85) B7(-2.6,5.85) B9(-1.3,5.85) B13(1.3,5.85) B15(2.6,5.85) B16(3.25,5.85) B18(4.55,5.85) B19(5.2,5.85) B20(5.85,5.85) B21(6.5,5.85) C1(-6.5,5.2) C2(-5.85,5.2) C3(-5.2,5.2) C4(-4.55,5.2) C5(-3.9,5.2) C6(-3.25,5.2) C7(-2.6,5.2) C8(-1.95,5.2) C11(0,5.2) C14(1.95,5.2) C15(2.6,5.2) C16(3.25,5.2) C17(3.9,5.2) C18(4.55,5.2) C19(5.2,5.2) C20(5.85,5.2) C21(6.5,5.2) D1(-6.5,4.55) D2(-5.85,4.55) D3(-5.2,4.55) D4(-4.55,4.55) D5(-3.9,4.55) D6(-3.25,4.55) D7(-2.6,4.55) D8(-1.95,4.55) D9(-1.3,4.55) D13(1.3,4.55) D14(1.95,4.55) D15(2.6,4.55) D16(3.25,4.55) D17(3.9,4.55) D18(4.55,4.55) D19(5.2,4.55) D20(5.85,4.55) D21(6.5,4.55) E1(-6.5,3.9) E3(-5.2,3.9) E4(-4.55,3.9) E5(-3.9,3.9) E6(-3.25,3.9) E7(-2.6,3.9) E8(-1.95,3.9) E14(1.95,3.9) E15(2.6,3.9) E16(3.25,3.9) E17(3.9,3.9) E18(4.55,3.9) E19(5.2,3.9) E21(6.5,3.9) F1(-6.5,3.25) F2(-5.85,3.25) F3(-5.2,3.25) F4(-4.55,3.25) F5(-3.9,3.25) F6(-3.25,3.25) F7(-2.6,3.25) F8(-1.95,3.25) F9(-1.3,3.25) F13(1.3,3.25) F14(1.95,3.25) F15(2.6,3.25) F16(3.25,3.25) F17(3.9,3.25) F18(4.55,3.25) F19(5.2,3.25) F20(5.85,3.25) F21(6.5,3.25) G1(-6.5,2.6) G2(-5.85,2.6) G3(-5.2,2.6) G4(-4.55,2.6) G5(-3.9,2.6) G6(-3.25,2.6) G7(-2.6,2.6) G8(-1.95,2.6) G9(-1.3,2.6) G10(-0.65,2.6) G11(0,2.6) G12(0.65,2.6) G13(1.3,2.6) G14(1.95,2.6) G15(2.6,2.6) G16(3.25,2.6) G17(3.9,2.6) G18(4.55,2.6) G19(5.2,2.6) G20(5.85,2.6) G21(6.5,2.6) H1(-6.5,1.95) H3(-5.2,1.95) H4(-4.55,1.95) H5(-3.9,1.95) H6(-3.25,1.95) H7(-2.6,1.95) H8(-1.95,1.95) H9(-1.3,1.95) H10(-0.65,1.95) H11(0,1.95) H12(0.65,1.95) H13(1.3,1.95) H14(1.95,1.95) H15(2.6,1.95) H16(3.25,1.95) H17(3.9,1.95) H18(4.55,1.95) H19(5.2,1.95) H21(6.5,1.95) J1(-6.5,1.3) J2(-5.85,1.3) J4(-4.55,1.3) J6(-3.25,1.3) J7(-2.6,1.3) J8(-1.95,1.3) J9(-1.3,1.3) J10(-0.65,1.3) J11(0,1.3) J12(0.65,1.3) J13(1.3,1.3) J14(1.95,1.3) J15(2.6,1.3) J16(3.25,1.3) J18(4.55,1.3) J20(5.85,1.3) J21(6.5,1.3) K7(-2.6,0.65) K8(-1.95,0.65) K9(-1.3,0.65) K10(-0.65,0.65) K11(0,0.65) K12(0.65,0.65) K13(1.3,0.65) K14(1.95,0.65) K15(2.6,0.65) L1(-6.5,0) L3(-5.2,0) L7(-2.6,0) L8(-1.95,0) L9(-1.3,0) L11(0,0) L13(1.3,0) L14(1.95,0) L15(2.6,0) L19(5.2,0) L21(6.5,0) M7(-2.6,-0.65) M8(-1.95,-0.65) M9(-1.3,-0.65) M10(-0.65,-0.65) M11(0,-0.65) M12(0.65,-0.65) M13(1.3,-0.65) M14(1.95,-0.65) M15(2.6,-0.65) N1(-6.5,-1.3) N2(-5.85,-1.3) N4(-4.55,-1.3) N6(-3.25,-1.3) N7(-2.6,-1.3) N8(-1.95,-1.3) N9(-1.3,-1.3) N10(-0.65,-1.3) N11(0,-1.3) N12(0.65,-1.3) N13(1.3,-1.3) N14(1.95,-1.3) N15(2.6,-1.3) N16(3.25,-1.3) N18(4.55,-1.3) N20(5.85,-1.3) N21(6.5,-1.3) P1(-6.5,-1.95) P3(-5.2,-1.95) P4(-4.55,-1.95) P5(-3.9,-1.95) P6(-3.25,-1.95) P7(-2.6,-1.95) P8(-1.95,-1.95) P9(-1.3,-1.95) P10(-0.65,-1.95) P11(0,-1.95) P12(0.65,-1.95) P13(1.3,-1.95) P14(1.95,-1.95) P15(2.6,-1.95) P16(3.25,-1.95) P17(3.9,-1.95) P18(4.55,-1.95) P19(5.2,-1.95) P21(6.5,-1.95) R1(-6.5,-2.6) R2(-5.85,-2.6) R3(-5.2,-2.6) R4(-4.55,-2.6) R5(-3.9,-2.6) R6(-3.25,-2.6) R7(-2.6,-2.6) R8(-1.95,-2.6) R9(-1.3,-2.6) R10(-0.65,-2.6) R11(0,-2.6) R12(0.65,-2.6) R13(1.3,-2.6) R14(1.95,-2.6) R15(2.6,-2.6) R16(3.25,-2.6) R17(3.9,-2.6) R18(4.55,-2.6) R19(5.2,-2.6) R20(5.85,-2.6) R21(6.5,-2.6) T1(-6.5,-3.25) T2(-5.85,-3.25) T3(-5.2,-3.25) T4(-4.55,-3.25) T5(-3.9,-3.25) T6(-3.25,-3.25) T7(-2.6,-3.25) T8(-1.95,-3.25) T9(-1.3,-3.25) T13(1.3,-3.25) T14(1.95,-3.25) T15(2.6,-3.25) T16(3.25,-3.25) T17(3.9,-3.25) T18(4.55,-3.25) T19(5.2,-3.25) T20(5.85,-3.25) T21(6.5,-3.25) U1(-6.5,-3.9) U3(-5.2,-3.9) U4(-4.55,-3.9) U5(-3.9,-3.9) U6(-3.25,-3.9) U7(-2.6,-3.9) U8(-1.95,-3.9) U14(1.95,-3.9) U15(2.6,-3.9) U16(3.25,-3.9) U17(3.9,-3.9) U18(4.55,-3.9) U19(5.2,-3.9) U21(6.5,-3.9) V1(-6.5,-4.55) V2(-5.85,-4.55) V3(-5.2,-4.55) V4(-4.55,-4.55) V5(-3.9,-4.55) V6(-3.25,-4.55) V7(-2.6,-4.55) V8(-1.95,-4.55) V9(-1.3,-4.55) V13(1.3,-4.55) V14(1.95,-4.55) V15(2.6,-4.55) V16(3.25,-4.55) V17(3.9,-4.55) V18(4.55,-4.55) V19(5.2,-4.55) V20(5.85,-4.55) V21(6.5,-4.55) W1(-6.5,-5.2) W2(-5.85,-5.2) W3(-5.2,-5.2) W4(-4.55,-5.2) W5(-3.9,-5.2) W6(-3.25,-5.2) W7(-2.6,-5.2) W8(-1.95,-5.2) W11(0,-5.2) W14(1.95,-5.2) W15(2.6,-5.2) W16(3.25,-5.2) W17(3.9,-5.2) W18(4.55,-5.2) W19(5.2,-5.2) W20(5.85,-5.2) W21(6.5,-5.2) Y1(-6.5,-5.85) Y2(-5.85,-5.85) Y3(-5.2,-5.85) Y4(-4.55,-5.85) Y6(-3.25,-5.85) Y7(-2.6,-5.85) Y9(-1.3,-5.85) Y13(1.3,-5.85) Y15(2.6,-5.85) Y16(3.25,-5.85) Y18(4.55,-5.85) Y19(5.2,-5.85) Y20(5.85,-5.85) Y21(6.5,-5.85)
  silkscreen extent -7.15,-7.15 7.15,7.15, body extent -7,-7 7,7, height 1.22
TPL5010DDCR [mm]
  rrect25% 1.45x0.59 smd: 1(-1.155,0.95) 2(-1.155,0) 3(-1.155,-0.95) 4(1.155,-0.95) 5(1.155,0) 6(1.155,0.95)
  silkscreen extent -2.5,-1.57 0.8,1.57, body extent -1.4,-1.45 1.4,1.45, height 1.1
UQFN-16_4X4_EP2.6X2.6 [mm]
  rrect50% 0.8x0.35 smd paste+0 mask+0.075: 1(-2,0.975) 2(-2,0.325) 3(-2,-0.325) 4(-2,-0.975) 9(2,-0.975) 10(2,-0.325) 11(2,0.325) 12(2,0.975)
  rrect50% 0.35x0.8 smd paste+0 mask+0.057: 5(-0.975,-2) 6(-0.325,-2) 7(0.325,-2) 8(0.975,-2) 13(0.975,2) 14(0.325,2) 15(-0.325,2) 16(-0.975,2)
  rect 2.6x2.6 smd paste-0.25 mask+0.075: 17(0,0)
  silkscreen extent -2.15,-2.15 2.15,2.15, body extent -2,-2 2,2, height 0.5
VQFN-HR-10 [mm]
  rect 0.65x0.3 smd: 1(-0.938,0.692) 4(-0.941,-0.708) 7(0.909,-0.708) 10(0.909,0.692)
  rect 0.25x0.65 smd: 1(-0.738,0.867) 4(-0.741,-0.883) 7(0.709,-0.883) 10(0.709,0.867)
  rect 0.65x0.25 smd: 2(-0.938,0.216) 3(-0.941,-0.233) 8(0.909,-0.233) 9(0.909,0.216)
  rect 0.3x2.4 smd: 5(-0.265,-0.008) 6(0.235,-0.007)
  silkscreen extent -1.3,-1.25 1.28,1.23, body extent -1.03,-1.01 0.97,0.99, height 1
VREG_LM1117MP-3.3/NOPB [mm]
  rect 2.15x0.95 smd: 1(-2.9,2.3) 2(-2.9,0) 3(-2.9,-2.3)
  rect 2.15x3.25 smd: 4(2.9,0)
  silkscreen extent -4.7,-3.25 1.75,3.25, body extent -3.5,-3.25 3.5,3.25, height 1.8
XTAL_ECS2401037B2JTNTR [mm]
  rect 0.85x0.75 smd paste+0 mask+0.102: 1(-0.675,-0.525) 2(0.675,-0.525) 3(0.675,0.525) 4(-0.675,0.525)
  silkscreen extent -1.8,-0.55 -1.6,-0.35, body extent -1,-0.8 1,0.8, height 0.5
ZDO_SOD223-SC-76_NEX [mil]
  rect 46x18 smd paste+0 mask+0: 1(-44,0) 2(44,0)
  Keep-Out Layer region: -19,-24.5 -19,24.5 19,24.5 19,-24.5
  silkscreen extent -83,-32 40,32, body extent -53,-26 53,26, height 43

## Part data
BT1: "BATTERY HOLDER COIN 12.5MM SMD, SMT, 1 Coin Cell, 12mm, Plastic, UL94V-0", Package=None, Check_prices=https://www.snapeda.com/parts/1056/Keystone/view-part/?ref=eda, MF="Keystone Electronics Corp.", MP=1056, SnapEDA_Link=https://www.snapeda.com/parts/1056/Keystone/view-part/?ref=snap
BT2 BT3 BT4 BT5: library part BT2, "Switch button 2 pin"
C1 C2 C3 C4 C5 C6 C7 C8 C9 C10 C11 C12 C13 C14 C15 C16 C17 C18 C19 C20 C21 C22 C23 C24 C25 C26 C27 C28 C29 C30 C31 C32 C33 C34 C35 C36 C37 C38 C39 C40 C41 C42 C43 C44 C45 C46 C47 C48 C49 C50 C51 C52 C53 C54 C55 C56 C57 C58 C59 C60 C61 C62 C63 C64 C65 C66 C67 C68 C69 C70 C71 C72 C73 C74 C75 C76 C77 C78 C79 C80 C81 C82 C83 C84 C85 C86 C87 C88 C89 C90 C91 C92 C93 C94 C95 C96 C97 C98 C99 C100 C101 C102 C103 C104 C105 C106 C107 C108 C109 C110 C111 C112 C113 C114 C115 C116 C117 C118 C119 C120 C121 C122 C123 C124 C125 C126 C127 C128 C129 C130 C131 C132 C133 C134 C135 C136 C137 C138 C139 C140 C141 C142 C143 C144 C145 C146 C147 C148 C149 C150 C151 C152 C153 C154 C155 C156 C157 C158 C159 C160 C161 C162 C163 C164 C165 C166 C167 C168 C169 C170 C171: library part _CAP_C_2, "CAP CHIP"
CR1: "Automotive dual-line TVS in SOT323-3L for CAN bus (12 V system)", Manufacturer_Name=STMicroelectronics, Copyright="Copyright (C) 2025 Ultra Librarian. All rights reserved.", Manufacturer_Part_Number=ESDCAN02-2BWY, RefDes=RefDes, Type=Type
D1 D5: library part BAT54C-G, "DIODE ARR SCHOTT 30V 200MA SOT23", Forward Current=200mA, Manufacturer 1="Comchip Technology", Operating Temperature="-55C to +125C", Package=SOT-23-3, Power=225mW, Reverse Current=2mA, Reverse Voltage=30V, Supplier Part Number 1=641-1320-1-ND, Category=Diode, ComponentLink1Description="SVN Datasheet", ComponentLink1URL=https://chn-vm-apps.microchip.com/mchprepo/parts/Datasheets/BAT54.pdf, ComponentLink2Description="Local Datasheet", ComponentLink2URL=C:\ALTIUM_WORK\00001_MCHP-CDB\Datasheets\BAT54.pdf, ComponentLink3Description="Open Symbol", ComponentLink3URL="C:\ALTIUM_WORK\00001_MCHP-CDB\Library\LibraryRefs\Diode Schottky Dual CK.SchLib", ComponentLink4Description="Open Footprint", ComponentLink4URL=C:\ALTIUM_WORK\00001_MCHP-CDB\Library\Footprints\SOT-23-3.PcbLib, ComponentLink5Description="Open Footprint 2", ComponentLink6Description="Open Footprint 3", ComponentLink7Description="Open Footprint 4", Description_="DIO SCTKY ARRAY BAT54C-G 520mV 200mA 30V SMD SOT-23-3", Dev Tools Status=Production, Manufacturer Part Number 1=BAT54C-G, MCHP-ID=DIODE1841, Owner="Cristina Salanti", Populated=YES, Quantity Override=1, Restricted Sourcing=No, Reverse Recovery Time=5ns, Revision=1, Status="MCL Design", Supplier 1=Digi-Key, Symbol="Diode Schottky Dual CK", Type="Schottky Array"
D2: library part LED_RED, "LED RED CLEAR 0603 SMD"
D3: "DIODE SCHOTTKY 40V 5A SMA", MPN=SS34, Solder=SMT
D4: library part LED_YELLOW, "LED YELLOW CLEAR 0603 SMD"
D6: library part LED_GREEN, "LED GREEN CLEAR 0603 SMD"
D7: library part RGB, "CLV1A-FKB-CK1VW1DE1BB7C3C3, LED RGB 4PLCC SMD", Forward Current="20mA, 20mA, 20mA", Manufacturer 1="Cree Inc.", Manufacturer Part Number 1=CLV1A-FKB-CK1VW1DE1BB7C3C3, Operating Temperature="-40C - +100C", Package=4-PLCC, Power="130mW, 100mW, 100mW", Reverse Current=10uA, Reverse Voltage=5V, Supplier Part Number 1=CLV1A-FKB-CK1VW1DE1BB7C3C3CT-ND, Category=Diode, ComponentLink1Description="SVN Datasheet", ComponentLink1URL=https://chn-vm-apps.microchip.com/mchprepo/parts/Datasheets/CLV1A-FKB_Rev5, ComponentLink2Description="Local Datasheet", ComponentLink2URL=C:\ALTIUM_WORK\00001_MCHP-CDB\Datasheets\CLV1A-FKB_Rev5, ComponentLink3Description="Open Symbol", ComponentLink3URL=C:\ALTIUM_WORK\00001_MCHP-CDB\Library\LibraryRefs\LED_RGB_CLV1A.SchLib, ComponentLink4Description="Open Footprint", ComponentLink4URL=C:\ALTIUM_WORK\00001_MCHP-CDB\Library\Footprints\PLCC-4_CLV1A-FKB.PcbLib, ComponentLink5Description="Open Footprint 2", ComponentLink6Description="Open Footprint 3", ComponentLink7Description="Open Footprint 4", Description_="DIO LED TRI RED, GREEN, BLUE 2V, 3.2V, 3.2V 20mA, 20mA, 20mA SMD 4-PLCC", Dev Tools Status=Production, MCHP-ID=DIODE1214, Owner="Randolph Sobrepena", Populated=YES, Quantity Override=1, Revision=2, Status="MCL Design", Supplier 1=Digi-Key, Symbol=LED_RGB_CLV1A, Type="LED Tricolor"
D8: "DIODE ZENER 15V 300MW SOD323", Manufacturer_Name=Nexperia, Manufacturer_Part_Number=SZMM3Z18VT1GX, Copyright="Copyright (C) 2026 Ultra Librarian. All rights reserved."
D9: library part _LED_RED, "LED RED CLEAR 0603 SMD"
DC1: library part DCIN, "Jack DC input"
FB2: "FERRITE BEAD 120 OHM 0603 1LN", Manufacturer_Name=Murata, Copyright="Copyright (C) 2025 Ultra Librarian. All rights reserved.", Manufacturer_Part_Number=BLM18PG121SN1D
J1 J19: "Connector Header Surface Mount, Right Angle 9 position 0.059\" (1.50mm)"
J2 J7: "Connector Header Surface Mount, Right Angle 8 position 0.059\" (1.50mm)`"
J3: library part CON1632, Current=3A, Manufacturer 1="Würth Elektronik", Manufacturer 2="SHENZHEN JUNHAO ENGINEERING", Manufacturer Part Number 1=61300211121, Manufacturer Part Number 2=R-211-0211-0021-000, Supplier Part Number 1=732-5315-ND, Voltage=250V, Assembly Type=TH, Category=Connector, ComponentLink1Description="SVN Datasheet", ComponentLink1URL=https://chn-vm-apps.microchip.com/mchprepo/parts/Datasheets/6130xx11121.pdf, ComponentLink2Description="Local Datasheet", ComponentLink2URL=C:\ALTIUM_WORK\00001_MCHP-CDB\Datasheets\6130xx11121.pdf, ComponentLink3Description="Open Symbol", ComponentLink3URL="C:\ALTIUM_WORK\00001_MCHP-CDB\Library\LibraryRefs\Header 1x2.SchLib", ComponentLink4Description="Open Footprint", ComponentLink4URL=C:\ALTIUM_WORK\00001_MCHP-CDB\Library\Footprints\HDR_M_2.54_1x2.PcbLib, ComponentLink5Description="Open Footprint 2", ComponentLink6Description="Open Footprint 3", ComponentLink7Description="Open Footprint 4", Description_="CON HDR-2.54 Male 1x2 Gold 5.84MH TH VERT", Dev Tools Status=Production, MCHP-ID=CON1632, Owner="Narasimha Murthy", Populated=YES, Quantity Override=1, Revision=3, Status="MCL Design", Supplier 1=Digi-Key, Supplier 2="SHENZHEN JUNHAO ENGINEERING", Supplier Part Number 2=R-211-0211-0021-000, Symbol="Header 1x2", Type="Header 2.54mm"
J4 J5 J10: Package=None, Availability=Unavailable, Price=None
  J4 J5: MF=Samtec, MP=ESQ-126-14-G-D
  J10: MP=SAMTEC-TLE-110-01-X-DV-A
J6: "1mm SINGLE ELEMENT INTERFACE", Package=None, Availability=Unavailable, MP=FSI-110-03-X-D-AD-TR, Price=None
J8: library part "Header 5x1"
J9: "1.50mm Pitch, Pico-Lock PCB Header, Single Row, Right-Angle, Surface Mount, Gold (Au) Plating, Positive Lock, 6 Circuits, Tape and Reel", Manufacturer_Name="Molex Connector Corporation", Copyright="Copyright (C) 2025 Ultra Librarian. All rights reserved.", Datasheet=https://www.molex.com/en-us/products/part-detail-pdf/5040500691?display=pdf, Manufacturer_Part_Number=5040500691, RefDes=RefDes, Type=Type
J11: library part 0475890001, "CONN RCPT MICRO USB AB 5P SMD RA", Current="1A, 1.8A", Manufacturer 1="Molex, LLC", Operating Temperature="-35C to +85C", Supplier Part Number 1=WM17143CT-ND, Voltage=30VAC, Assembly Type=SMD, Category=Connector, ComponentLink1Description="SVN Datasheet", ComponentLink1URL=https://chn-vm-apps.microchip.com/mchprepo/parts/Datasheets/475890001_sd.pdf, ComponentLink2Description="Local Datasheet", ComponentLink2URL=C:\ALTIUM_WORK\00001_MCHP-CDB\Datasheets\475890001_sd.pdf, ComponentLink3Description="Open Symbol", ComponentLink3URL="C:\ALTIUM_WORK\00001_MCHP-CDB\Library\LibraryRefs\CON USB2.0 Mini_Micro.SchLib", ComponentLink4Description="Open Footprint", ComponentLink4URL=C:\ALTIUM_WORK\00001_MCHP-CDB\Library\Footprints\CON_USB_Micro-AB_SMD_RA_MOLEX_0475890001.PcbLib, ComponentLink5Description="Open Footprint 2", ComponentLink6Description="Open Footprint 3", ComponentLink7Description="Open Footprint 4", Custom Parameters="10000 mating cycles", Description_="CON USB2.0 MICRO-AB FEMALE SMD R/A", Dev Tools Status=Production, Manufacturer Part Number 1=0475890001, MCHP-ID=CON1753, Owner="Dragos Danaila", Populated=YES, Quantity Override=1, Revision=1, Status="MCL Design", Supplier 1=Digi-Key, Symbol="CON USB2.0 Mini_Micro", Type=USB
J12 J13: library part CON_JUMPER, "used for choose jumper, header 3pins 2.54mm", Current=3A, Manufacturer 1="METZ CONNECT USA Inc.", Manufacturer Part Number 1=PR20203VBNN, Operating Temperature="-40C to +105C", Supplier Part Number 1=Deprecated_1849-1003-ND, Assembly Type=TH, Category=Connector, ComponentLink1Description="SVN Datasheet", ComponentLink1URL=https://chn-vm-apps.microchip.com/mchprepo/parts/Datasheets/Data_sheet_PR202XXVBNN.PDF, ComponentLink2Description="Local Datasheet", ComponentLink2URL=C:\ALTIUM_WORK\00001_MCHP-CDB\Datasheets\Data_sheet_PR202XXVBNN.PDF, ComponentLink3Description="Open Symbol", ComponentLink3URL="C:\ALTIUM_WORK\00001_MCHP-CDB\Library\LibraryRefs\Header 1x3.SchLib", ComponentLink4Description="Open Footprint", ComponentLink4URL=C:\ALTIUM_WORK\00001_MCHP-CDB\Library\Footprints\HDR_M_2.54_1x3.PcbLib, ComponentLink5Description="Open Footprint 2", ComponentLink6Description="Open Footprint 3", ComponentLink7Description="Open Footprint 4", Description_="CON HDR-2.54 Male 1x3 Gold 6.10MH TH VERT", Dev Tools Status=Production, MCHP-ID=CON2491, Owner="Dragos Danaila", Populated=YES, Quantity Override=1, Revision=2, Status="MCL Design", Supplier 1=Digi-Key, Symbol="Header 1x3", Type="Header 2.54mm"
J14: library part SDCARD, Current=0.5A, Manufacturer 1="Amphenol ICC (Commercial Products)", Manufacturer Part Number 1=GSD090012SEU, Operating Temperature="-40C to +90C", Supplier Part Number 1=664-GSD090012SEUCT-ND, Voltage=5V, Assembly Type=SMD, Category=Connector, ComponentLink1Description="SVN Datasheet", ComponentLink1URL=https://chn-vm-apps.microchip.com/mchprepo/parts/Datasheets/gsd09001xseu.pdf, ComponentLink2Description="Local Datasheet", ComponentLink2URL=C:\ALTIUM_WORK\00001_MCHP-CDB\Datasheets\gsd09001xseu.pdf, ComponentLink3Description="Open Symbol", ComponentLink3URL="C:\ALTIUM_WORK\00001_MCHP-CDB\Library\LibraryRefs\CON SD CARD 11P_amphenol.SchLib", ComponentLink4Description="Open Footprint", ComponentLink4URL=C:\ALTIUM_WORK\00001_MCHP-CDB\Library\Footprints\CON_SD_GSD090012SEU.PcbLib, ComponentLink5Description="Open Footprint 2", ComponentLink6Description="Open Footprint 3", ComponentLink7Description="Open Footprint 4", Description_="CON FLASH SD 9+2P PUSH-PUSH SMD R/A", Dev Tools Status=Production, MCHP-ID=CON2490, Owner="Ciprian Abramov", Populated=YES, Quantity Override=1, Restricted Sourcing=No, Revision=2, Status="MCL Design", Supplier 1=Digi-Key, Symbol="CON SD CARD 11P_amphenol", Type="Flash Card"
J15: "USB-C (USB TYPE-C) USB 2.0 Receptacle Connector 24 (16+8 Dummy) Position Board Edge, Cutout; Surface Mount; Through Hole, Right Angle", Package=None, Check_prices=https://www.snapeda.com/parts/USB4520-03-0-A/Global+Connector+Technology/view-part/?ref=eda, MF="Global Connector Technology", MP=USB4520-03-0-A, SnapEDA_Link=https://www.snapeda.com/parts/USB4520-03-0-A/Global+Connector+Technology/view-part/?ref=snap
J17: library part CON2625, Current=3A, Manufacturer 1="Adam Tech", Manufacturer Part Number 1=BHR-20-VUA, Operating Temperature="-50C to +105C", Supplier Part Number 1=2057-BHR-20-VUA-ND, Voltage=250VAC, Assembly Type=TH, Category=Connector, ComponentLink1Description="SVN Datasheet", ComponentLink1URL=https://chn-vm-apps.microchip.com/mchprepo/parts/Datasheets/bhr-xx-vua-data-sheet.pdf, ComponentLink2Description="Local Datasheet", ComponentLink2URL=C:\ALTIUM_WORK\00001_MCHP-CDB\Datasheets\bhr-xx-vua-data-sheet.pdf, ComponentLink3Description="Open Symbol", ComponentLink3URL="C:\ALTIUM_WORK\00001_MCHP-CDB\Library\LibraryRefs\Header 2x10.SchLib", ComponentLink4Description="Open Footprint", ComponentLink4URL=C:\ALTIUM_WORK\00001_MCHP-CDB\Library\Footprints\HDR_M_2.54_2X10_SBH11-PBPC-D10-ST-BK.PcbLib, ComponentLink5Description="Open Footprint 2", ComponentLink6Description="Open Footprint 3", ComponentLink7Description="Open Footprint 4", Description_="CON HDR-2.54 Male 2x10 Gold Shroud 9.1MH TH VERT", Dev Tools Status=Design, MCHP-ID=CON2625, Owner="Dragos Danaila", Populated=YES, Quantity Override=1, Revision=1, Status="MCL Design", Supplier 1=Digi-Key, Symbol="Header 2x10", Type="Header 2.54mm"
L1: library part _IND, "FIXED IND 22UH 2.5A 170 MOHM SMD"
L2 L3 L4 L5: library part DFE252012P-1R5M=P2, "Fixed Inductor 1.5uH 3.5A R060 SMD", Package=None, Availability=Unavailable, MP=DFE252012P-1R5M=P2, Price=None
LED1: library part "LED SMD", "RED, for MCP2221"
Q1: "BJT, SOT-23, 40V, 600mA, NPN, 0.25W, 150Â°C", Package="SOT-23 Diotec", Check_prices=https://www.snapeda.com/parts/MMBT2222A/Diotec/view-part/?ref=eda, MF="Diotec Semiconductor", MP=MMBT2222A, SnapEDA_Link=https://www.snapeda.com/parts/MMBT2222A/Diotec/view-part/?ref=snap
Q2 Q3 Q4 Q5 Q6 Q7 Q8: "N-Channel 30 V 5.7A (Ta) 1.4W (Ta) Surface Mount SOT-23-3", Package="SOT-23 Alpha &amp; Omega Semiconductor Inc.", Check_prices=https://www.snapeda.com/parts/AO3400A/Alpha/view-part/?ref=eda, MF="Alpha & Omega Semiconductor", MP=AO3400A, SnapEDA_Link=https://www.snapeda.com/parts/AO3400A/Alpha/view-part/?ref=snap
Q9: library part AOSP2132130V, "MOSFET P-CH 30V 11A 8SOIC", Current=11A, Drain to Source Voltage=30V, Gate to Source Voltage=25V, Manufacturer 1="Alpha & Omega Semiconductor Inc.", Manufacturer Part Number 1=AOSP21321, Operating Temperature="-55C to +150C", Package="SOIC 8", Power=3.1W, Supplier Part Number 1=785-1795-2-ND, Category=Transistor, ComponentLink1Description="SVN Datasheet", ComponentLink1URL=https://chn-vm-apps.microchip.com/mchprepo/parts/Datasheets/AOSP21321.pdf, ComponentLink2Description="Local Datasheet", ComponentLink2URL=C:\ALTIUM_WORK\00001_MCHP-CDB\Datasheets\AOSP21321.pdf, ComponentLink3Description="Open Symbol", ComponentLink3URL="C:\ALTIUM_WORK\00001_MCHP-CDB\Library\LibraryRefs\Transistor MOS-P SSSGDDDD.SchLib", ComponentLink4Description="Open Footprint", ComponentLink4URL=C:\ALTIUM_WORK\00001_MCHP-CDB\Library\Footprints\SOIC-8.PcbLib, ComponentLink5Description="Open Footprint 2", ComponentLink6Description="Open Footprint 3", ComponentLink7Description="Open Footprint 4", Description_="TRANS FET P-CH AOSP2132130V 11A 3.1W SOIC-8", Dev Tools Status=Design, MCHP-ID=TRA1639, Owner="Dragos Danaila", Populated=YES, Quantity Override=1, Revision=1, Status="MCL Design", Supplier 1=Digi-Key, Symbol="Transistor MOS-P SSSGDDDD", Type=FET
R1 R2 R3 R4 R5 R6 R7 R8 R9 R10 R11 R12 R13 R14 R15 R16 R17 R18 R19 R20 R21 R22 R23 R24 R25 R26 R27 R28 R29 R30 R31 R32 R33 R38 R39 R40 R41 R42 R43 R44 R45 R46 R47 R48 R49 R50 R51 R52 R53 R54 R55 R56 R57 R58 R59 R60 R61 R62 R63 R64 R65 R66 R67 R68 R69 R70 R71 R72 R73 R74 R75 R76 R77 R78 R79 R80 R81 R82 R83 R84 R85 R86 R87 R88 R89 R90 R91 R92 R93 R94 R95 R96 R97 R98 R99 R100 R101 R102 R103 R104 R105 R106 R107 R108 R109 R110 R111 R112 R113 R114 R115 R116 R117 R118 R119 R120 R121 R122 R123 R124 R125 R126 R127 R128 R129 R130 R131 R132 R133 R134 R135 R136 R137 R138 R139 R140 R141 R142 R143 R144 R145 R146 R147 R148 R149 R150 R151 R152: library part _RES_B_2, "RES"
R34 R35 R36 R37: library part SHUNT, "Shunt Resistor, RES 0.047 OHM 1% 3/4W 1206", Current=4A, Manufacturer 1=SUSUMU, Manufacturer Part Number 1=KRL1632E-M-R047-F-T5, Operating Temperature="-55C to 155C", Package=1206, Power=3/4W, Supplier Part Number 1=408-1578-2-ND, Temperature Coefficient=±50ppm/C, Tolerance=1%, Category=Resistor, ComponentLink1Description="SVN Datasheet", ComponentLink1URL=https://chn-vm-apps.microchip.com/mchprepo/parts/Datasheets/n_catalog_partition09_en.pdf, ComponentLink2Description="Local Datasheet", ComponentLink2URL=C:\ALTIUM_WORK\00001_MCHP-CDB\Datasheets\n_catalog_partition09_en.pdf, ComponentLink3Description="Open Symbol", ComponentLink3URL="C:\ALTIUM_WORK\00001_MCHP-CDB\Library\LibraryRefs\Shunt 4 Pin.SchLib", ComponentLink4Description="Open Footprint", ComponentLink4URL=C:\ALTIUM_WORK\00001_MCHP-CDB\Library\Footprints\RES_C_1206_SHUNT.PcbLib, ComponentLink5Description="Open Footprint 2", ComponentLink6Description="Open Footprint 3", ComponentLink7Description="Open Footprint 4", Composition=MF, Description_="RES SHUNT MF 0.047R 1% 3/4W SMD 1206", Dev Tools Status=Design, MCHP-ID=RSMT1405, Owner="Ciprian Abramov", Populated=YES, Quantity Override=1, Restricted Sourcing=No, Revision=1, Status="MCL Design", Supplier 1=Digi-Key, Symbol="Shunt 4 Pin", Type=Shunt
SW1: library part SW3x1
TP1 TP2 TP3 TP4 TP5 TP6 TP7: library part "Test Point", "Test Point", Solder=NF
U2: "5.5V to 36V Input, 3A, 500kHz Step-Down Converter", Package="HSOIC-8 Texas Instruments", Availability="In Stock", Check_prices=https://www.snapeda.com/parts/TPS5430DDAR/Texas+Instruments/view-part/?ref=eda, MF="Texas Instruments", MP=TPS5430DDAR, Price=None, Purchase-URL=https://pricing.snapeda.com/search/part/TPS5430DDAR/?ref=eda, SnapEDA_Link=https://www.snapeda.com/parts/TPS5430DDAR/Texas+Instruments/view-part/?ref=snap
U3: library part MCP2221A-I/SL, "IC USB TO I2C/UART 14SOIC", Manufacturer 1="Microchip Technology", Operating Temperature="-40C to +85C", Supplier Part Number 1=MCP2221A-I/SL-ND, Category=MCHP-Interface, ComponentLink1Description="SVN Datasheet", ComponentLink1URL=https://chn-vm-apps.microchip.com/mchprepo/parts/Datasheets/20005292B.pdf, ComponentLink2Description="Local Datasheet", ComponentLink2URL=C:\ALTIUM_WORK\00001_MCHP-CDB\Datasheets\20005292B.pdf, ComponentLink3Description="Open Symbol", ComponentLink3URL="C:\ALTIUM_WORK\00001_MCHP-CDB\Library\LibraryRefs\MCP2221 SOIC-14_TSSOP-14_PDIP-14.SchLib", ComponentLink4Description="Open Footprint", ComponentLink4URL=C:\ALTIUM_WORK\00001_MCHP-CDB\Library\Footprints\SOIC-14.PcbLib, ComponentLink5Description="Open Footprint 2", ComponentLink6Description="Open Footprint 3", ComponentLink7Description="Open Footprint 4", Description_="MCHP INTERFACE USB I2C UART MCP2221A-I/SL SOIC-14", Dev Tools Status=Design, Manufacturer 2="Microchip Technology", Manufacturer Part Number 1=MCP2221A-I/SL, Manufacturer Part Number 2=MCP2221A-I/SL, MCHP-ID=MIC9078, Owner="Octavian Stroe", Populated=YES, Quantity Override=1, Revision=A, Status="MCL Design", Supplier 1=Digi-Key, Supplier 2=Mouser, Supplier Part Number 2=579-MCP2221A-I/SL, Symbol="MCP2221 SOIC-14_TSSOP-14_PDIP-14", Type=USB
U4: library part MIC8878, Manufacturer 1="Microchip Technology", Manufacturer Part Number 1=MCP16502TAB-E/S8B, Supplier Part Number 1=150-MCP16502TAB-E/S8BCT-ND, Category=MCHP-Analog, ComponentLink1Description="SVN Datasheet", ComponentLink2Description="Local Datasheet", ComponentLink2URL=C:\ALTIUM_WORK\00001_MCHP-CDB\Datasheets\MCP16502-High-Performance-PMIC-for-SAMA5DX-SAM9X6-MPUs-Data-Sheet-DS20006275B.pdf, ComponentLink3Description="Open Symbol", ComponentLink3URL="C:\ALTIUM_WORK\00001_MCHP-CDB\Library\LibraryRefs\MCP16502 QFN-32.SchLib", ComponentLink4Description="Open Footprint", ComponentLink4URL=C:\ALTIUM_WORK\00001_MCHP-CDB\Library\Footprints\QFN-32_5X5_EP3.7X3.7.PcbLib, ComponentLink5Description="Open Footprint 2", ComponentLink6Description="Open Footprint 3", ComponentLink7Description="Open Footprint 4", Description_="MCHP ANALOG PMIC SWITCHER Buck ADJ MCP16502TAB-E/S8B QFN-32 for SAMA7G5 MPU with LPDDR/DDR2/DDR3", Dev Tools Status=Design, MCHP-ID=MIC8878, Owner="Dragos Danaila", Populated=YES, Quantity Override=1, Revision=1, Status="MCL Design", Supplier 1=Digi-Key, Symbol="MCP16502 QFN-32", Type=Switcher